# Altium PCB PCB1.PcbDoc (part 1 of 2)
Units mm, origin at the board's own origin, x right, y up, seen from the top; angles counter-clockwise.
Board outline 99.83 x 79.12 mm, 2 copper layers (Top Layer, Bottom Layer); 98 components, 101 nets, 440 pads, 74 vias.
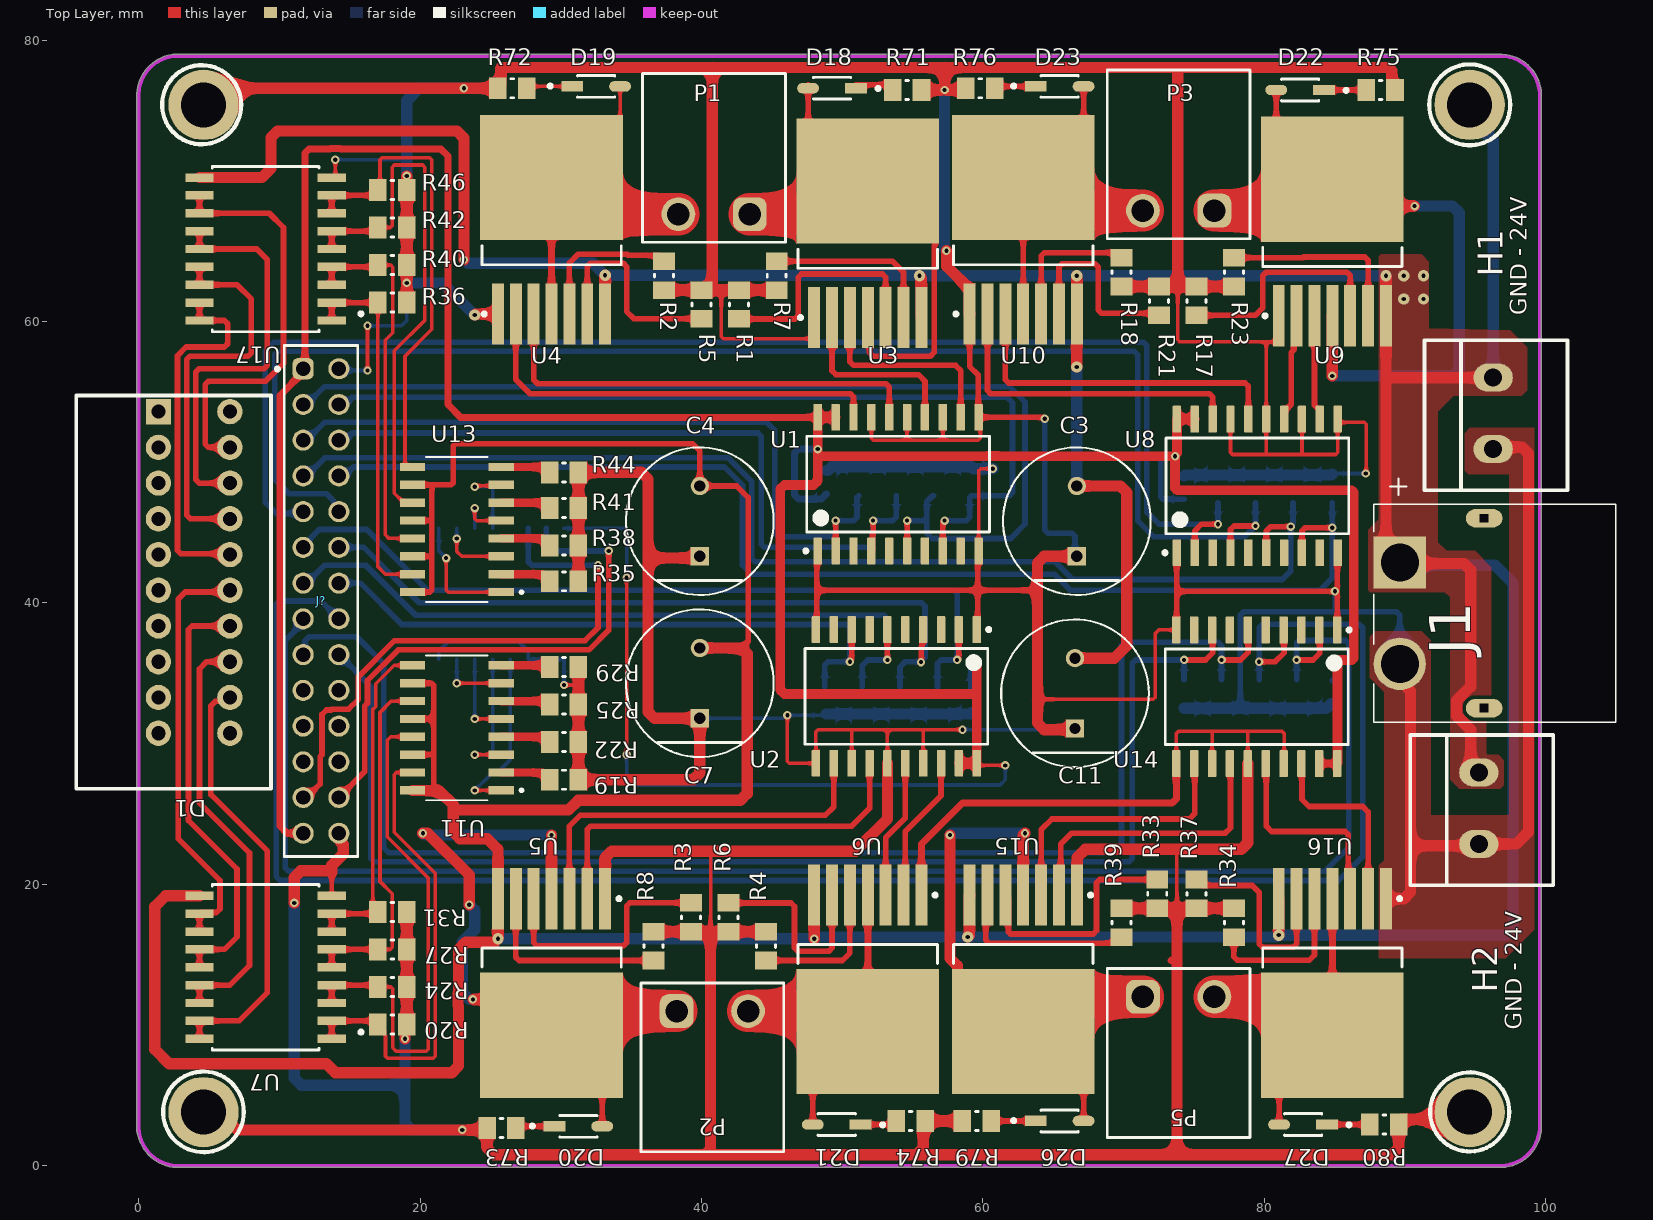
[diagram p0: Top Layer view]
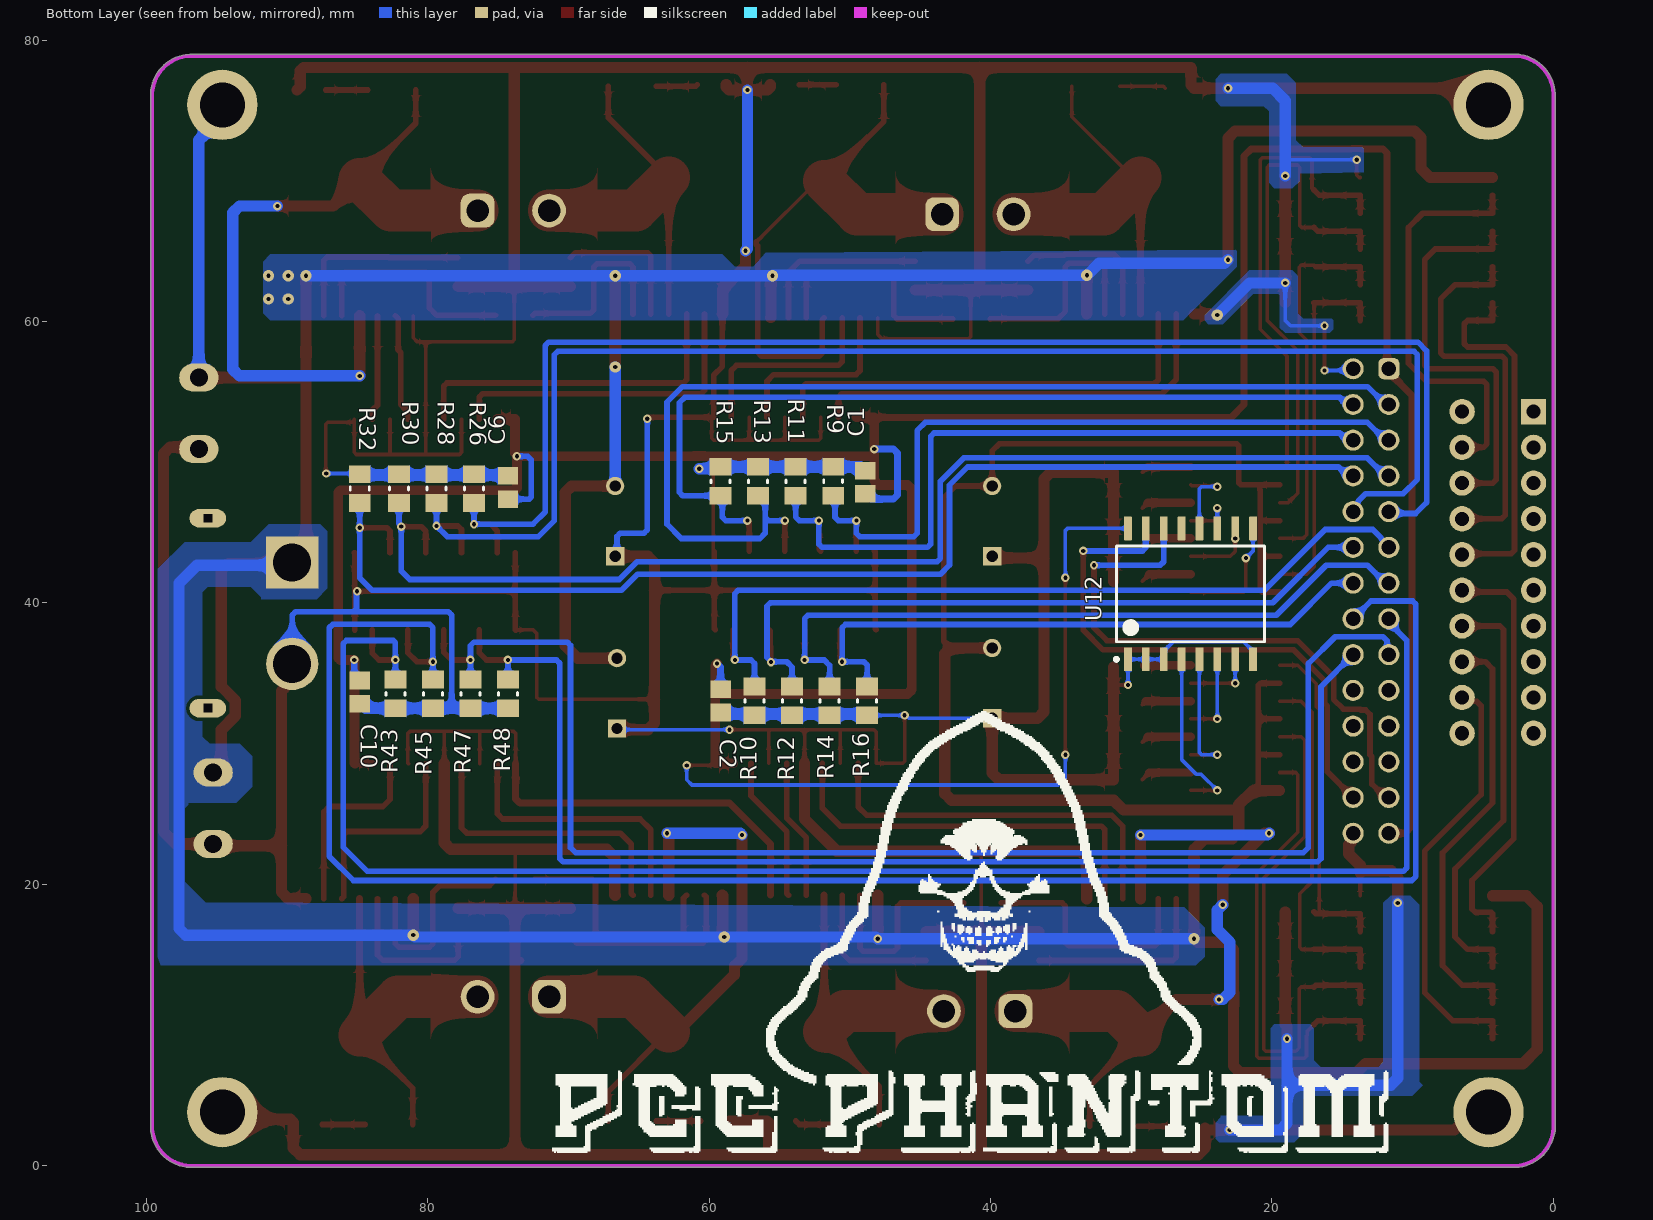
[diagram p1: Bottom Layer view, seen from below]

## Layer stack, top to bottom
Top Solder: solder mask 0.0102, Solder Resist, Dk 3.5
Top Layer: signal copper 0.0356
Dielectric 1: dielectric 0.32, FR-4, Dk 4.8
Bottom Layer: signal copper 0.0356
Bottom Solder: solder mask 0.0102, Solder Resist, Dk 3.5

## Board outline
2.924,-0.127 cw(c2.794,2.794) -0.092,2.325 -0.127,2.413 -0.127,75.943 cw(c2.794,76.073) 2.325,78.959 2.413,78.994 96.644,78.994 cw(c96.774,76.073) 99.695,76.206 99.695,76.199 99.695,2.924 cw(c96.774,2.794) 99.698,2.794 cw(c96.774,2.794) 99.695,2.664 99.695,2.413 99.66,2.325 cw(c96.774,2.794) 96.908,-0.127 96.901,-0.127

## Design rules (kind name [scope] priority, off if disabled: settings)
Clearance [All] p1: gap=0.254 ignorepadtopadclearanceinfootprint=FALSE
PolygonConnect GND [InNet('GND') vs InNet('GND')] p1: connectstyle=Direct reliefconductorwidth=0.254 reliefentries=4 polygonreliefangle="90 Angle" airgapwidth=0.254
PolygonConnect 12V [InNet('+12') vs InNet('+12')] p2: connectstyle=Direct reliefconductorwidth=0.254 reliefentries=4 polygonreliefangle="90 Angle" airgapwidth=0.254
PolygonConnect [All] p3: connectstyle=Relief reliefconductorwidth=0.254 reliefentries=4 polygonreliefangle="90 Angle" airgapwidth=0.254
RoutingVias MOTOR_1 [InNetClass('MOTOR')] p1: holewidth=0.5 width=1 viastyle="Through Hole" minholewidth=0.4 minwidth=0.8 maxholewidth=0.5 maxwidth=0.9
RoutingVias RoutingVias_SIGNAL [All] p2: holewidth=0.4 width=0.8 viastyle="Through Hole" minholewidth=0.2 minwidth=0.4 maxholewidth=0.3 maxwidth=0.6
RoutingVias RoutingVias_POWER [InNetClass('POWER')] p3: holewidth=0.7 width=1.7 viastyle="Through Hole" minholewidth=0.5 minwidth=1.5 maxholewidth=0.6 maxwidth=1.6
SolderMaskExpansion [All] p1: expansion=0.102 istentingtop=FALSE
Width MOTOR [InNetClass('MOTOR')] p1: maxlimit=4 minlimit=0.25 preferedwidth=3 minimp=50.000000 maximp=50.000000 favimp=50.000000
Width Width_SIGNAL [InNetClass('SINGAL')] p2: maxlimit=0.4 minlimit=0.2 preferedwidth=0.3 minimp=50.000000 maximp=50.000000 favimp=50.000000
Width Width_POWER [InNetClass('POWER')] p3: maxlimit=0.8 minlimit=0.3 preferedwidth=0.5 minimp=50.000000 maximp=50.000000 favimp=50.000000
30 further rules are at their usual default settings.

## Components (designator, comment, footprint, x,y, rotation, side; value= is the part's Value field where it differs from the comment)
C1 "VJ0805A101GXACW1BC" CAPC2013X145X50NL20T20 48.895,48.577 r90 bottom
C2 "VJ0805A101GXACW1BC" CAPC2013X145X50NL20T20 59.182,33.029 r270 bottom
C3 "EEUFM1H151B" FP-RAD-TH-D_10_0_5-L_12_5-MFG 66.675,45.807 r90 top
C4 "EEUFM1H151B" FP-RAD-TH-D_10_0_5-L_12_5-MFG 39.878,45.807 r90 top
C6 "VJ0805A101GXACW1BC" CAPC2013X145X50NL20T20 74.295,48.197 r90 bottom
C7 "EEUFM1H151B" FP-RAD-TH-D_10_0_5-L_12_5-MFG 39.878,34.29 r90 top
C10 "VJ0805A101GXACW1BC" CAPC2013X145X50NL20T20 84.836,33.655 r270 bottom
C11 "EEUFM1H151B" FP-RAD-TH-D_10_0_5-L_12_5-MFG 66.548,33.568 r90 top
D1 "10P" KF141_10P 1.397,53.594 r270 top
D18 "1N5819HW-7-F" FP-SOD123-IPC_A 49.276,76.581 r180 top
D19 "1N5819HW-7-F" FP-SOD123-IPC_A 32.512,76.708 r0 top
D20 "1N5819HW-7-F" FP-SOD123-IPC_A 31.242,2.794 r0 top
D21 "1N5819HW-7-F" FP-SOD123-IPC_A 49.608,2.921 r180 top
D22 "1N5819HW-7-F" FP-SOD123-IPC_A 82.55,76.454 r180 top
D23 "1N5819HW-7-F" FP-SOD123-IPC_A 65.454,76.708 r0 top
D26 "1N5819HW-7-F" FP-SOD123-IPC_A 65.454,3.175 r0 top
D27 "1N5819HW-7-F" FP-SOD123-IPC_A 82.755,2.921 r180 top
H1 "2P" KF128-2P 91.313,58.674 r270 top
H2 "2P" KF128-2P 90.297,30.607 r270 top
J1 "XT60PW-F" AMASS_XT60PW-F 89.631,39.262 r90 top
J? "61302821821" 61302821821 12.954,40.132 r270 top
P1 "KF -2 5.08" 691312510002 40.894,71.628 r180 top
P2 "KF -2 5.08" 691312510002 40.767,6.985 r0 top
P3 "KF -2 5.08" 691312510002 73.914,71.882 r180 top
P5 "KF -2 5.08" 691312510002 73.914,8.001 r0 top
R1 "CRCW08051K00FKTC" RESC2013X50X30ML20T20 42.672,61.205 r90 top
R2 "CRCW08051K00FKTC" RESC2013X50X30ML20T20 37.338,63.255 r270 top
R3 "CRCW08051K00FKTC" RESC2013X50X30ML20T20 39.243,17.653 r270 top
R4 "CRCW08051K00FKTC" RESC2013X50X30ML20T20 44.577,15.603 r90 top
R5 "CRCW08051K00FKTC" RESC2013X50X30ML20T20 40.005,61.205 r270 top
R6 "CRCW08051K00FKTC" RESC2013X50X30ML20T20 41.91,17.653 r90 top
R7 "CRCW08051K00FKTC" RESC2013X50X30ML20T20 45.339,63.255 r90 top
R8 "CRCW08051K00FKTC" RESC2013X50X30ML20T20 36.576,15.603 r270 top
R9 "CRCW08051K00FKTC" RESC2013X50X30ML20T20 51.181,48.65 r270 bottom
R10 "CRCW08051K00FKTC" RESC2013X50X30ML20T20 56.769,33.029 r90 bottom
R11 "CRCW08051K00FKTC" RESC2013X50X30ML20T20 53.848,48.641 r270 bottom
R12 "CRCW08051K00FKTC" RESC2013X50X30ML20T20 54.102,33.029 r90 bottom
R13 "CRCW08051K00FKTC" RESC2013X50X30ML20T20 56.515,48.641 r270 bottom
R14 "CRCW08051K00FKTC" RESC2013X50X30ML20T20 51.435,33.029 r90 bottom
R15 "CRCW08051K00FKTC" RESC2013X50X30ML20T20 59.182,48.641 r270 bottom
R16 "CRCW08051K00FKTC" RESC2013X50X30ML20T20 48.768,33.029 r90 bottom
R17 "CRCW08051K00FKTC" RESC2013X50X30ML20T20 75.184,61.459 r90 top
R18 "CRCW08051K00FKTC" RESC2013X50X30ML20T20 69.85,63.509 r270 top
R19 "CRCW08051K00FKTC" RESC2013X50X30ML20T20 30.226,27.432 r180 top
R20 "CRCW08051K00FKTC" RESC2013X50X30ML20T20 18.025,10.033 r180 top
R21 "CRCW08051K00FKTC" RESC2013X50X30ML20T20 72.517,61.459 r270 top
R22 "CRCW08051K00FKTC" RESC2013X50X30ML20T20 30.226,30.099 r180 top
R23 "CRCW08051K00FKTC" RESC2013X50X30ML20T20 77.851,63.509 r90 top
R24 "CRCW08051K00FKTC" RESC2013X50X30ML20T20 18.025,12.7 r180 top
R25 "CRCW08051K00FKTC" RESC2013X50X30ML20T20 30.226,32.766 r180 top
R26 "CRCW08051K00FKTC" RESC2013X50X30ML20T20 76.708,48.124 r270 bottom
R27 "CRCW08051K00FKTC" RESC2013X50X30ML20T20 18.025,15.367 r180 top
R28 "CRCW08051K00FKTC" RESC2013X50X30ML20T20 79.375,48.124 r270 bottom
R29 "CRCW08051K00FKTC" RESC2013X50X30ML20T20 30.226,35.433 r180 top
R30 "CRCW08051K00FKTC" RESC2013X50X30ML20T20 82.042,48.124 r270 bottom
R31 "CRCW08051K00FKTC" RESC2013X50X30ML20T20 18.025,18.034 r180 top
R32 "CRCW08051K00FKTC" RESC2013X50X30ML20T20 84.836,48.124 r270 bottom
R33 "CRCW08051K00FKTC" RESC2013X50X30ML20T20 72.39,19.313 r270 top
R34 "CRCW08051K00FKTC" RESC2013X50X30ML20T20 77.851,17.263 r90 top
R35 "CRCW08051K00FKTC" RESC2013X50X30ML20T20 30.226,41.529 r180 top
R36 "CRCW08051K00FKTC" RESC2013X50X30ML20T20 18.025,61.341 r180 top
R37 "CRCW08051K00FKTC" RESC2013X50X30ML20T20 75.184,19.313 r90 top
R38 "CRCW08051K00FKTC" RESC2013X50X30ML20T20 30.226,44.069 r180 top
R39 "CRCW08051K00FKTC" RESC2013X50X30ML20T20 69.85,17.263 r270 top
R40 "CRCW08051K00FKTC" RESC2013X50X30ML20T20 18.025,64.008 r0 top
R41 "CRCW08051K00FKTC" RESC2013X50X30ML20T20 30.226,46.736 r180 top
R42 "CRCW08051K00FKTC" RESC2013X50X30ML20T20 18.025,66.675 r0 top
R43 "CRCW08051K00FKTC" RESC2013X50X30ML20T20 82.296,33.528 r90 bottom
R44 "CRCW08051K00FKTC" RESC2013X50X30ML20T20 30.226,49.276 r180 top
R45 "CRCW08051K00FKTC" RESC2013X50X30ML20T20 79.629,33.528 r90 bottom
R46 "CRCW08051K00FKTC" RESC2013X50X30ML20T20 18.025,69.342 r180 top
R47 "CRCW08051K00FKTC" RESC2013X50X30ML20T20 76.962,33.528 r90 bottom
R48 "CRCW08051K00FKTC" RESC2013X50X30ML20T20 74.295,33.528 r90 bottom
R71 "CRCW08051K00FKTC" RESC2013X50X30ML20T20 54.61,76.454 r180 top
R72 "CRCW08051K00FKTC" RESC2013X50X30ML20T20 26.552,76.581 r180 top
R73 "CRCW08051K00FKTC" RESC2013X50X30ML20T20 25.781,2.667 r0 top
R74 "CRCW08051K00FKTC" RESC2013X50X30ML20T20 54.864,3.175 r0 top
R75 "CRCW08051K00FKTC" RESC2013X50X30ML20T20 88.265,76.454 r180 top
R76 "CRCW08051K00FKTC" RESC2013X50X30ML20T20 59.817,76.581 r180 top
R79 "CRCW08051K00FKTC" RESC2013X50X30ML20T20 59.563,3.175 r0 top
R80 "CRCW08051K00FKTC" RESC2013X50X30ML20T20 88.528,2.921 r0 top
U1 "SN74AHCT244MDWREP" DW0020A_N 53.975,48.438 r90 top
U2 "SN74AHCT244MDWREP" DW0020A_N 53.848,33.35 r270 top
U3 "BTS7960B" INF-P-TO-263-7-6_M 51.816,66.277 r90 top
U4 "BTS7960B" INF-P-TO-263-7-6_M 29.337,66.531 r90 top
U5 "BTS7960B" INF-P-TO-263-7-6_M 29.337,12.971 r270 top
U6 "BTS7960B" INF-P-TO-263-7-6_M 51.816,13.225 r270 top
U7 "ULN2803ADWRG4" FP-DW0018A-MFG 9.017,14.097 r180 top
U8 "SN74AHCT244MDWREP" DW0020A_N 79.502,48.311 r90 top
U9 "BTS7960B" INF-P-TO-263-7-6_M 84.836,66.404 r90 top
U10 "BTS7960B" INF-P-TO-263-7-6_M 62.865,66.531 r90 top
U11 "TLP281-4" SOIC127P700X210-16N 22.606,31.115 r180 top
U12 "PCF8574DWR" DW0016A_L 25.781,40.64 r90 bottom
U13 "TLP281-4" SOIC127P700X210-16N 22.606,45.212 r180 top
U14 "SN74AHCT244MDWREP" DW0020A_N 79.462,33.325 r270 top
U15 "BTS7960B" INF-P-TO-263-7-6_M 62.865,13.225 r270 top
U16 "BTS7960B" INF-P-TO-263-7-6_M 84.836,12.971 r270 top
U17 "ULN2803ADWRG4" FP-DW0018A-MFG 9.017,65.151 r180 top

## Footprints (in the part's own frame and the unit in brackets; to place one, negate y for a bottom-side part, rotate by r counter-clockwise, add the part's x,y. Pads: shape width x height; smd on the part's side, far side on the other; paste and mask are expansions set on the pad)
61302821821 [mm] "Socket Header, Pitch 2.54 mm, THT, Vertical, dual row, 28p"
  rrect50% 1.5x1.5 hole 1.02: 1(-16.51,-1.27)
  round 1.5 hole 1.02: 2(-16.51,1.27) 3(-13.97,-1.27) 4(-13.97,1.27) 5(-11.43,-1.27) 6(-11.43,1.27) 7(-8.89,-1.27) 8(-8.89,1.27) 9(-6.35,-1.27) 10(-6.35,1.27) 11(-3.81,-1.27) 12(-3.81,1.27) 13(-1.27,-1.27) 14(-1.27,1.27) 15(1.27,-1.27) 16(1.27,1.27) 17(3.81,-1.27) 18(3.81,1.27) 19(6.35,-1.27) 20(6.35,1.27) 21(8.89,-1.27) 22(8.89,1.27) 23(11.43,-1.27) 24(11.43,1.27) 25(13.97,-1.27) 26(13.97,1.27) 27(16.51,-1.27) 28(16.51,1.27)
  silkscreen extent -18.16,-3.22 18.16,2.62, body extent -18.03,-2.54 18.03,2.54, height 8.45
691312510002 [mm] "5,08mm - PCB Headers - Horizontal - Opened ends - 02p"
  rrect50% 2.4x2.4 hole 1.6: 1(-2.54,4)
  round 2.4 hole 1.6: 2(2.54,4)
  silkscreen extent -5.08,-6 5.08,6, body extent -5.08,-6 5.08,6, height 8.55
AMASS_XT60PW-F [mm]
  rect 3.716x3.716 / inner round 3.716 / far side rect 3.716x3.716 hole 2.7 mask+0.102: 1(3.6,0)
  round 3.716 hole 2.7 mask+0.102: 2(-3.6,0)
  oval 1.3x2.6 hole 0.6 square mask+0.102: SH1(-6.75,-6) SH2(6.75,-6)
  silkscreen extent -7.75,-15.35 9.6,1.85, body extent -7.75,-15.35 7.75,1.85, height 8.4
CAPC2013X145X50NL20T20 [mm] "Chip Capacitor, 2-Leads, Body 2.00x1.25mm, IPC Medium Density"
  rect 1.25x1.45 smd: 1(-0.825,0) 2(0.825,0)
  body extent -1.1,-0.72 1.1,0.72, height 1.45
DW0016A_L [mm] "SOIC, 16-Leads, Body 10.5x7.6mm, Pitch 1.27mm, IPC High Density"
  rrect18% 1.7x0.55 smd: 1(-4.65,4.445) 2(-4.65,3.175) 3(-4.65,1.905) 4(-4.65,0.635) 5(-4.65,-0.635) 6(-4.65,-1.905) 7(-4.65,-3.175) 8(-4.65,-4.445) 9(4.65,-4.445) 10(4.65,-3.175) 11(4.65,-1.905) 12(4.65,-0.635) 13(4.65,0.635) 14(4.65,1.905) 15(4.65,3.175) 16(4.65,4.445)
  silkscreen extent -4.77,-5.25 3.4,5.4, body extent -5.14,-5.13 5.14,5.13, height 2.5
DW0020A_N [mm] "SOIC, 20-Leads, Body 13x7.6mm, Pitch 1.27mm, IPC Medium Density"
  rrect17% 1.9x0.6 smd: 1(-4.75,5.715) 2(-4.75,4.445) 3(-4.75,3.175) 4(-4.75,1.905) 5(-4.75,0.635) 6(-4.75,-0.635) 7(-4.75,-1.905) 8(-4.75,-3.175) 9(-4.75,-4.445) 10(-4.75,-5.715) 11(4.75,-5.715) 12(4.75,-4.445) 13(4.75,-3.175) 14(4.75,-1.905) 15(4.75,-0.635) 16(4.75,0.635) 17(4.75,1.905) 18(4.75,3.175) 19(4.75,4.445) 20(4.75,5.715)
  silkscreen extent -4.87,-6.5 3.4,6.69, body extent -5.16,-6.4 5.16,6.4, height 2.52
FP-DW0018A-MFG [mm]
  rect 2x0.6 smd paste-1000 mask+0: 1(-4.7,5.08) 2(-4.7,3.81) 3(-4.7,2.54) 4(-4.7,1.27) 5(-4.7,0) 6(-4.7,-1.27) 7(-4.7,-2.54) 8(-4.7,-3.81) 9(-4.7,-5.08) 10(4.7,-5.08) 11(4.7,-3.81) 12(4.7,-2.54) 13(4.7,-1.27) 14(4.7,0) 15(4.7,1.27) 16(4.7,2.54) 17(4.7,3.81) 18(4.7,5.08)
  silkscreen extent -6.9,-5.87 3.8,5.87, body extent -5.8,-6.05 5.8,6.05, height 0.25
FP-RAD-TH-D_10_0_5-L_12_5-MFG [mm]
  rect 1.3x1.3 hole 0.8 paste-2539.97 mask+0: 1(-2.5,0)
  round 1.3 hole 0.8 paste-2539.97 mask+0: 2(2.5,0)
  silkscreen extent -5.25,-5.25 5.25,5.25, body extent -5.35,-5.35 5.35,5.35, height 0.25
FP-SOD123-IPC_A [mm]
  rect 1.557x0.742 smd paste+0 mask+0: 1(-1.7,0)
  rrect100% 1.557x0.742 smd paste+0 mask+0: 2(1.7,0)
  silkscreen extent -3.39,-0.78 1.33,0.78, body extent -2.98,-1.28 2.98,1.28, height 0.25
INF-P-TO-263-7-6_M [mm] "DPAK, 7-Leads, Body 9.9x9.2mm, Pitch 1.27mm, IPC Low Density"
  rect 4.35x0.85 smd: 1(-6,3.81) 2(-6,2.54) 3(-6,1.27) 4(-6,0) 5(-6,-1.27) 6(-6,-2.54) 7(-6,-3.81)
  rect 8.9x10.15 smd: 8(3.7,0)
  silkscreen extent -6.12,-4.95 -1.15,4.95, body extent -2.5,-4.95 6.9,4.95, height 4.5
KF128-2P [mm]
  oval 2x2.8 hole 1.27: 1(2.667,4.953) 2(7.747,4.953)
  silkscreen extent 0,0.08 10.67,10.24, body extent -0.05,0 10.71,10.3, height 14.59
KF141_10P [mm]
  rect 1.8x1.8 hole 1: 1(0,0)
  round 1.8 hole 1: 2(2.54,0) 3(5.08,0) 4(7.62,0) 5(10.16,0) 6(12.7,0) 7(15.24,0) 8(17.78,0) 9(20.32,0) 10(22.86,0) 11(22.86,5.08) 12(20.32,5.08) 13(17.78,5.08) 14(15.24,5.08) 15(12.7,5.08) 16(10.16,5.08) 17(7.62,5.08) 18(5.08,5.08) 19(2.54,5.08) 20(0,5.08)
  silkscreen extent -1.14,-5.84 26.8,8, body extent -1.14,-5.8 26.8,8, height 12.5
RESC2013X50X30ML20T20 [mm] "Chip Resistor, 2-Leads, Body 2.00x1.25mm, IPC Low Density"
  rect 1.25x1.55 smd: 1(-1.025,0) 2(1.025,0)
  silkscreen extent -0.1,-0.67 0.1,0.67, body extent -1.1,-0.72 1.1,0.72, height 0.5
SOIC127P700X210-16N [mm]
  rect 1.8x0.59 smd: 1(-3.155,4.445) 2(-3.155,3.175) 3(-3.155,1.905) 4(-3.155,0.635) 5(-3.155,-0.635) 6(-3.155,-1.905) 7(-3.155,-3.175) 8(-3.155,-4.445) 9(3.155,-4.445) 10(3.155,-3.175) 11(3.155,-1.905) 12(3.155,-0.635) 13(3.155,0.635) 14(3.155,1.905) 15(3.155,3.175) 16(3.155,4.445)
  silkscreen extent -4.7,-5.15 2.2,5.15, body extent -3.5,-5.15 3.5,5.15, height 2.1

## Part data
C1 C2 C6 C10: library part CMP-2007-01634-1, Manufacturer=Vitramon, Part Number=VJ0805A101GXACW1BC
C3 C4 C7 C11: library part CMP-05427-001971-1, "Aluminum Electrolytic Capacitors (Radial Lead Type) 150uF ±20% 50V", Capacitance=150uF, Case/Package=Radial, ESR (Equivalent Series Resistance)=42mR, Max Operating Temperature=105°C, Min Operating Temperature=-40°C, Package Quantity=500, Ripple Current=1.17A, Tolerance=20%, Voltage Rating=50V, Contact Plating=Tin, Diameter=10mm, Dissipation Factor=0.1%, Height=12.5mm, Height - Seated (Max)=0.551inch, Impedance=42mR, Lead Diameter=0.6mm, Lead Free="Lead Free", Lead Pitch=5mm, Length=12.5mm, Life (Hours)=4000Hour, Mount="Through Hole", Packaging="Ammo Pack", Polarity=Polar, Radiation Hardening=No, RoHS Compliant=Yes, Series=FM, Termination=Radial, Voltage Rating (DC)=50V
D1: library part KF141_10p, "DOMINO 5.08MM"
D18 D19 D20 D21 D22 D23 D26 D27: library part CMP-0303-00003-3, "DIODE SCHOTTKY 40V 1A SOD123", Average Rectified Current=1A, Capacitance=110pF, Case/Package=SOD-123-2, Forward Voltage=450mV, Max Forward Surge Current (Ifsm)=25A, Max Operating Temperature=125°C, Max Power Dissipation=450mW, Max Repetitive Reverse Voltage (Vrrm)=40V, Min Operating Temperature=-65°C, Package Quantity=3000, Peak Reverse Current=50uA, Contact Plating=Tin, Current Rating=1A, Element Configuration=Single, Forward Current=1A, Height=1.25mm, Lead Free="Lead Free", Length=2.85mm, Max Reverse Voltage (DC)=40V, Number of Pins=2, Output Current=1A, Packaging="Tape and Reel", Peak Non-Repetitive Surge Current=25A, Polarity=Standard, Radiation Hardening=No, REACH SVHC="No SVHC", Termination=SMD/SMT, Voltage Rating (DC)=40V, Weight=0.000353oz, Width=1.7mm
H1 H2: library part KF-128-2P, "DOMINO 5.08MM"
J1: "Connector: DC supply; socket; female; XT60; 30A; 500V; PIN: 2; THT", Package=Package, Check_prices=https://www.snapeda.com/parts/XT60PW-F/AMASS/view-part/?ref=eda, MF=AMASS, MP=XT60PW-F, SnapEDA_Link=https://www.snapeda.com/parts/XT60PW-F/AMASS/view-part/?ref=snap
J?: library part CMP-1502-01360-4, "Btb Conn, Rcpt, 28Pos, 2Row, 2.54Mm Rohs Compliant: Yes", Contact Resistance=20mΩ, Current Rating=3A, Operating Supply Voltage=250V, Gender=Female, Lead Pitch=2.54mm, Number of Pins=28, Orientation=Vertical, RoHS=Non-Compliant
P1 P2 P3 P5: library part CMP-1502-02169-3, "312; 5.08MM Pitch Straight Pluggable Term Block, Pcb Header, Through Hole, 2 Way", Color=Green, Current=20A, Voltage=300V, Contact Material=Brass, Contact Plating=Tin, Gender=Male, Height=12mm, Lead Pitch=5.08mm, Length=11.5mm, Mount="Through Hole", Number of Contacts=2, Number of Levels=1, Number of Pins=2, Number of Positions Per Level=2, Number of Rows=1, Packaging=Box, Pitch=5.08mm, RoHS=Compliant, Termination=Solder, Width=10.16mm
R1 R2 R3 R4 R5 R6 R7 R8 R9 R10 R11 R12 R13 R14 R15 R16 R17 R18 R19 R20 R21 R22 R23 R24 R25 R26 R27 R28 R29 R30 R31 R32 R33 R34 R35 R36 R37 R38 R39 R40 R41 R42 R43 R44 R45 R46 R47 R48 R71 R72 R73 R74 R75 R76 R79 R80: library part CMP-2001-04268-1, Manufacturer="Vishay Dale", Part Number=CRCW08051K00FKTC
U1 U2 U8 U14: library part CMP-0440-00672-3, "Enhanced Product Octal Buffers/Drivers With 3-State Outputs, DW0020A, LARGE T&R", F @ Nom Voltage(Max)(Mhz)=110, Generic Part Number=SN74AHCT244-EP, ICC @ Nom Voltage(Max)(mA)=0.04, Manufacturer="Texas Instruments", Operating Temperature Range(C)="-55 to 125", Rating="HiRel Enhanced Product", tpd @ Nom Voltage(Max)(ns)=9.5, Voltage(Nom)(V)=5, Code_JEDEC=MS-013, DatasheetVersion=SCLS493A, Input Type=TTL, Output Type=CMOS, PackageReference=DW0020A, PackageVersion=http://www.ti.com/lit/ml/mpds173a/mpds173a.pdf, VCC(Max)(V)=5.5, VCC(Min)(V)=4.5
U3 U4 U5 U6 U9 U10 U15 U16: library part CMP-1114-00025-1, "High Current PN Half Bridge NovalithIC, -40 to 150 degC, P-TO-263-7-6", Manufacturer=Infineon, ComponentLink1Description="Manufacturer URL", ComponentLink1URL=http://www.infineon.com/, ComponentLink2Description=Datasheet, ComponentLink2URL=http://www.infineon.com/dgdl/BTS7960_Datasheet.pdf?folderId=db3a304412b407950112b408e8c90004&fileId=db3a304412b407950112b43945006d5d&location=en.Products.Automotive_ICs.Motor_Drivers__Automotive_.Integrated_High_Current_Motor_Drivers__NovalithIC____Trilith, ComponentLink3Description="Package Specification", ComponentLink3URL=http://www.infineon.com/dgdl/BTS7970B_Datasheet.pdf?folderId=db3a304412b407950112b408e8c90004&fileId=db3a304412b407950112b43949b36d61&sId=db3a30433d68e984013d7db637dc5e6a, DatasheetVersion="Rev. 1.1", Green=FALSE, Halogen-free=FALSE, Iq (typ)="7 uA", Mounting Technology="Surface Mount", PackageDescription="7-Pin Plastic Transistor Single Outline Package, 9.9 x 9.2 mm Body, 1.27 mm Pitch", PackageReference=P-TO-263-7-6, PackageVersion=May-06, PartNumber=BTS7960B, RevisionNote="Re-Activated Devices"
U7 U17: library part CMP-04912-000023-1, "TRANS 8NPN DARL 50V 0.5A 18SO", Ambient Temperature Range High=+85°C, Ambient Temperature Range Low=-40°C, Manufacturer="Texas Instruments", Max Junction Temp=+150°C, Nominal Supply Current=0.93mA, Output Current=500mA, Output Voltage=50V, Package=DW0018A, Temperature="-40°C to +85°C", Automotive=No, Category=IC, ComponentLink2Description=Datasheet, ComponentLink2URL=http://www.ti.com/lit/ds/symlink/uln2803a.pdf, Device Class L1="Integrated Circuits (ICs)", Device Class L2="Power Management ICs", Device Class L3="Gate Drivers", Digikey Description="TRANS 8NPN DARL 50V 0.5A 18SO", Height=2.65mm, Ipc Land Pattern Name=SOIC127P1030X265-18, Lead Free=Yes, Manufacturer Part Number=ULN2803ADWRG4, Mouser Description="Darlington Transistors TRANSISTOR ARRAYS", Number Of Drivers=8, Number of Outputs=8, Octopart=https://octopart.com/uln2803adwrg4-texas+instruments-2343640, RoHS=TRUE, Standoff Height=0.1mm, Temperature Range High=+85°C, Temperature Range Low=-40°C, Turn Off Delay Time=130ns, Turn On Delay Time=20ns
U11 U13: "Optoisolator Transistor Output 2500Vrms 4 Channel 16-SOP", Package="SOP-16 Toshiba", Check_prices=https://www.snapeda.com/parts/TLP281-4/Toshiba/view-part/?ref=eda, MF="Toshiba Semiconductor", MP=TLP281-4, SnapEDA_Link=https://www.snapeda.com/parts/TLP281-4/Toshiba/view-part/?ref=snap
U12: library part CMP-0314-00117-2, "Remote 8-Bit I/O Expander for I2C-Bus, 2.5 to 6 V, -40 to 85 degC, 16-pin SOIC (DW), Green (RoHS & no Sb/Br)", Manufacturer="Texas Instruments", Max Frequency(kHz)=100, Voltage Nodes(V)="5, 3.3", # of I/Os=8, Code_JEDEC=MS-013-AA, ComponentLink1Description=Datasheet, ComponentLink1URL=http://www.ti.com/general/docs/lit/getliterature.tsp?genericPartNumber=PCF8574&fileType=pdf, ComponentLink2Description="Package Specification", ComponentLink2URL=http://www.ti.com/litv/pdf/msoi003g, DatasheetVersion=SCPS068G, Eco-Plan="Green (RoHS & no Sb/Br)", fSCLK(Max)(MHz)=0.1, I2C Address="0100 xxx", Interrupt Output=Yes, Mounting Technology="Surface Mount", PackageDescription="16-Pin Small Outline Integrated Circuit, 10.3 x 7.5 mm, Pitch 1.27 mm Pitch", PackageReference=DW0016A, PackageVersion="revG, Jan-2011", PartNumber=PCF8574DWR, Push-Pull I/O Type=Yes, Reset Input=No, SubFamily="I2C IO Expander", Vcc range(V)="2.5 to 6.0", VCC(Max)(V)=6, VCC(Min)(V)=2.5

## Free pads (board coordinates)
  round 5 hole 3.2: 3(4.6,3.8) 3(4.6,75.4) 3(94.6,3.8) 3(94.6,75.4)

## Via types
v1: diameter 0.6, hole 0.3, Top Layer to Bottom Layer, tented both sides, 61 vias
v2: diameter 0.8, hole 0.3, Top Layer to Bottom Layer, tented both sides, 13 vias

## Nets (pads, with @x,y where several pads share a name; then routed paths per layer and width w, separated by ;. In a path a pad name is that pad's centre, name@x,y a point inside that pad or via, vN(x,y) a via of type N, cw(c..) or ccw(c..) an arc to the next point about the centre after c; other vN are vias at no path point)
+5: C1.1 C2.1 C6.1 C10.1 J?.1 J?.27 U1.19 U1.20 U2.19 U2.20 U8.19 U8.20 U12.16 U14.19 U14.20 | length 285.8
  Top Layer w0.254: v1(34.671,29.21) v1(34.671,41.783) ; U2.20@59.563,28.6 59.715,28.448 v1(61.595,28.448)
  Top Layer w0.5: J?.27@11.684,23.622 10.541,23.622 10.033,24.13 10.033,54.737 11.811,56.515 11.811,71.97 12.104,72.263 13.595,72.263 13.637,72.305 14.303,72.305 14.345,72.263 21.463,72.263 21.971,71.755 21.971,54.102 22.885,53.188 U1.20@48.26,53.188 ; U14.19@83.907,28.575 U14.20@85.177,28.575
  Top Layer w0.7: U1.19@49.53,53.188 U1.20@48.26,53.188 v1(48.26,50.927) 48.26,50.546 ; U2.19@58.293,28.6 U2.20@59.563,28.6 59.563,33.401 ; v1(59.436,35.687) 59.436,35.66 59.563,35.533 59.563,33.401 ; U8.19@75.057,53.061 U8.20@73.787,53.061 73.787,50.64 73.66,50.513 v1(73.66,50.419) ; U14.20@85.177,28.575 85.197,28.595 85.197,35.921 v1(85.217,35.941) 86.211,35.941 86.36,36.09 86.36,47.857 86.211,48.006 73.809,48.006 73.66,48.155 v1(73.66,50.419) ; 48.26,50.546 48.387,50.419 60.317,50.419 60.332,50.434 61.08,50.434 61.095,50.419 v1(73.66,50.419) ; 48.26,50.546 48.26,48.68 47.967,48.387 45.886,48.387 45.593,48.094 45.593,33.821 45.886,33.528 59.436,33.528 59.563,33.401
  Bottom Layer w0.254: U12.16@30.226,45.29 34.522,45.29 34.671,45.141 v1(34.671,41.783) ; v1(34.671,29.21) 34.671,27.559 35.179,27.051 61.214,27.051 61.595,27.432 v1(61.595,28.448)
  Bottom Layer w0.4: v1(73.66,50.419) 72.898,50.419 72.643,50.164 72.643,47.521 72.792,47.372 C6.1@74.295,47.372 ; C10.1@84.836,34.48 85.217,34.861 v1(85.217,35.941)
  Bottom Layer w0.5: v1(48.26,50.927) 46.902,50.927 46.609,50.634 46.609,47.664 46.902,47.371 47.414,47.371 47.42,47.377 48.52,47.377 C1.1@48.895,47.752 ; C2.1@59.182,33.854 59.182,35.433 v1(59.436,35.687)
+12: C3.2 C4.2 C7.2 C11.2 H1.1 H2.1 J1.1 pad.3@94.6,75.4 U3.7 U4.7 U5.7 U6.7 U7.10 U9.7 U10.7 U11.10 U11.12 U11.14 U11.16 U13.10 U13.12 U13.14 U13.16 U15.7 U16.7 U17.10 | length 481
  Top Layer w0.4: U11.14@19.451,29.21 20.806,29.21 20.955,29.359 ; U11.12@19.451,31.75 20.955,31.75 ; U11.10@19.451,34.29 20.806,34.29 20.955,34.141 20.955,31.75 ; U13.16@19.451,40.767 20.679,40.767 20.828,40.916 20.828,43.318 ; U13.14@19.451,43.307 20.817,43.307 20.828,43.318 ; U13.12@19.451,45.847 20.701,45.847 20.828,45.72 ; U13.10@19.451,48.387 20.701,48.387 ; 21.336,26.67 20.955,27.051 20.955,29.359 ; 42.838,36.79 43.307,37.259 43.307,47.498 42.498,48.307 C4.2@39.878,48.307 39.878,50.8 39.37,51.308 22.501,51.308 22.352,51.159 22.352,48.536 22.203,48.387 20.701,48.387 ; 20.701,48.387 20.85,48.238 20.85,48.028 20.828,48.006 20.828,45.72 ; 20.828,43.318 20.828,45.72 ; 20.955,29.359 20.955,31.75
  Top Layer w0.8: U7.10@4.317,19.177 1.905,19.177 1.143,18.415 1.143,8.255 2.159,7.239 13.335,7.239 13.716,6.858 13.97,6.604 22.264,6.604 22.733,7.073 22.733,11.336 22.695,11.374 22.695,12.248 22.733,12.286 22.733,15.367 23.241,15.875 25.273,15.875 v2(25.527,16.129) U5.7@25.527,18.971 25.527,22.479 24.765,23.241 22.821,23.241 22.352,23.71 22.352,25.273 ; U17.10@4.317,70.231 8.763,70.231 9.398,70.866 9.398,73.064 9.867,73.533 22.606,73.533 23.114,73.025 v1(23.114,64.389) ; U11.16@19.451,26.67 21.336,26.67 22.352,25.654 22.352,25.273 ; U4.7@33.147,60.531 v2(33.147,63.281) ; C7.2@39.878,36.79 42.838,36.79 43.244,36.385 43.244,26.44 42.775,25.972 31.241,25.972 30.542,25.273 22.352,25.273 ; v1(48.006,16.129) U6.7@48.006,19.225 ; v2(55.499,63.246) 55.601,63.144 55.601,60.302 U3.7@55.626,60.277 ; v2(58.928,16.256) 59.03,16.358 59.03,19.2 U15.7@59.055,19.225 ; C11.2@66.548,36.068 69.342,36.068 70.231,36.957 70.231,47.838 69.762,48.307 C3.2@66.675,48.307 ; v2(66.675,56.769) U10.7@66.675,60.531 v2(66.675,63.246) ; v2(81.026,16.383) U16.7@81.026,18.971 ; v2(88.646,63.246) U9.7@88.646,60.404 88.646,55.88 ; H2.1@95.25,27.94 95.222,27.94 94.668,28.494 94.668,30.981 93.677,31.972 93.677,33.052 94.668,34.043 94.668,42.33 94.199,42.799 89.694,42.799 J1.1@89.631,42.862 88.646,43.847 88.646,55.88 ; H1.1@96.266,56.007 88.773,56.007 88.646,55.88
  Bottom Layer w0.8: v1(23.114,64.389) 23.368,64.135 32.293,64.135 v2(33.147,63.281) 55.464,63.281 v2(55.499,63.246) v2(66.675,63.246) v2(88.646,63.246) ; v2(25.527,16.129) v1(48.006,16.129) 48.133,16.256 v2(58.928,16.256) 80.899,16.256 v2(81.026,16.383) 97.206,16.383 97.675,16.852 97.675,41.39 96.393,42.672 89.821,42.672 J1.1@89.631,42.862 ; C3.2@66.675,48.307 v2(66.675,56.769) ; pad.3@94.6,74.819 94.6,74.564 96.266,72.898 H1.1@96.266,56.007
  other v2: 89.916,61.595 91.313,61.595 89.916,63.246 91.313,63.246
DIR_A1: J?.5 R9.2 U1.2 | length 52.3
  Top Layer w0.4: U1.2@49.53,43.688 v1(49.53,45.847)
  Bottom Layer w0.4: J?.5@11.811,51.435 13.208,52.832 44.633,52.832 45.212,52.253 45.212,44.938 45.446,44.704 49.291,44.704 49.53,44.943 v1(49.53,45.847) 50.82,45.847 51.054,46.081 51.054,47.498 R9.2@51.181,47.625
DIR_A2: J?.3 R13.2 U1.6 | length 75
  Top Layer w0.4: U1.6@54.61,43.688 v1(54.61,45.847)
  Bottom Layer w0.4: J?.3@11.811,53.975 13.208,55.372 61.885,55.372 62.992,54.265 62.992,45.593 61.976,44.577 56.387,44.577 56.007,44.957 56.007,46.074 ; v1(54.61,45.847) 55.78,45.847 56.007,46.074 ; R13.2@56.515,47.616 56.432,47.616 56.007,47.191 56.007,46.074
DIR_B1: J?.9 R26.2 U8.2 | length 99.1
  Top Layer w0.4: U8.2@75.057,43.561 75.057,45.105 75.545,45.593 v1(76.708,45.593)
  Bottom Layer w0.4: J?.9@11.811,46.355 9.779,46.355 8.998,47.136 8.998,57.911 9.615,58.528 71.413,58.528 71.647,58.294 71.647,46.463 72.517,45.593 v1(76.708,45.593) R26.2@76.708,47.099
DIR_B2: J?.7 R30.2 U8.6 | length 85.7
  Top Layer w0.4: U8.6@80.137,43.561 80.137,45.105 80.455,45.422 v1(81.876,45.422)
  Bottom Layer w0.4: J?.7@11.811,48.895 13.227,50.311 41.891,50.311 43.561,48.641 43.561,43.16 43.795,42.926 65.114,42.926 66.384,41.656 81.28,41.656 81.876,42.252 v1(81.876,45.422) ; v1@82.042,45.643 R30.2@82.042,47.099
DIR_C1: J?.15 R43.2 U14.2 | length 119
  Top Layer w0.4: v1(82.296,35.941) 83.459,35.941 83.947,36.429 U14.2@83.947,38.075
  Bottom Layer w0.4: J?.15@11.811,38.735 10.417,37.341 10.417,21.151 10.651,20.917 84.29,20.917 86.015,22.642 86.015,37.091 85.781,37.326 82.449,37.326 82.296,37.173 v1(82.296,35.941) R43.2@82.296,34.553
DIR_C2: J?.17 R47.2 U14.6 | length 101.2
  Top Layer w0.4: v1(76.962,35.941) 78.309,35.941 78.867,36.499 U14.6@78.867,38.075
  Bottom Layer w0.4: J?.17@11.811,36.195 11.813,36.197 11.813,37.303 12.102,37.592 15.494,37.592 17.399,35.687 17.399,22.606 17.761,22.244 69.488,22.244 69.85,22.606 69.85,36.977 70.084,37.211 76.708,37.211 76.962,36.957 v1(76.962,35.941) R47.2@76.962,34.553
DIR_D1: J?.11 R10.2 U2.2 | length 59.1
  Top Layer w0.4: v1(58.166,35.941) 58.293,36.068 U2.2@58.293,38.1
  Bottom Layer w0.4: J?.11@11.811,43.815 11.811,44.14 12.21,44.539 12.21,44.595 12.827,45.212 16.206,45.212 20.524,40.894 57.932,40.894 58.166,40.66 v1(58.166,35.941) 57.023,35.941 56.769,35.687 R10.2@56.769,34.054
DIR_D2: J?.13 R14.2 U2.6 | length 52.1
  Top Layer w0.4: v1(53.213,35.941) U2.6@53.213,38.1
  Bottom Layer w0.4: J?.13@11.811,41.275 13.208,42.672 16.129,42.672 19.685,39.116 52.979,39.116 53.213,38.882 v1@53.213,35.964 ; R14.2@51.435,34.054 51.435,35.56 51.816,35.941 v1(53.213,35.941)